# Altium PCB PCB1.PcbDoc
Units mil, origin at the board's own origin, x right, y up, seen from the top; angles counter-clockwise.
Board outline 4435 x 3180 mil, 2 copper layers (Top Layer, Bottom Layer); 13 components, 10 nets, 34 pads, 0 vias.
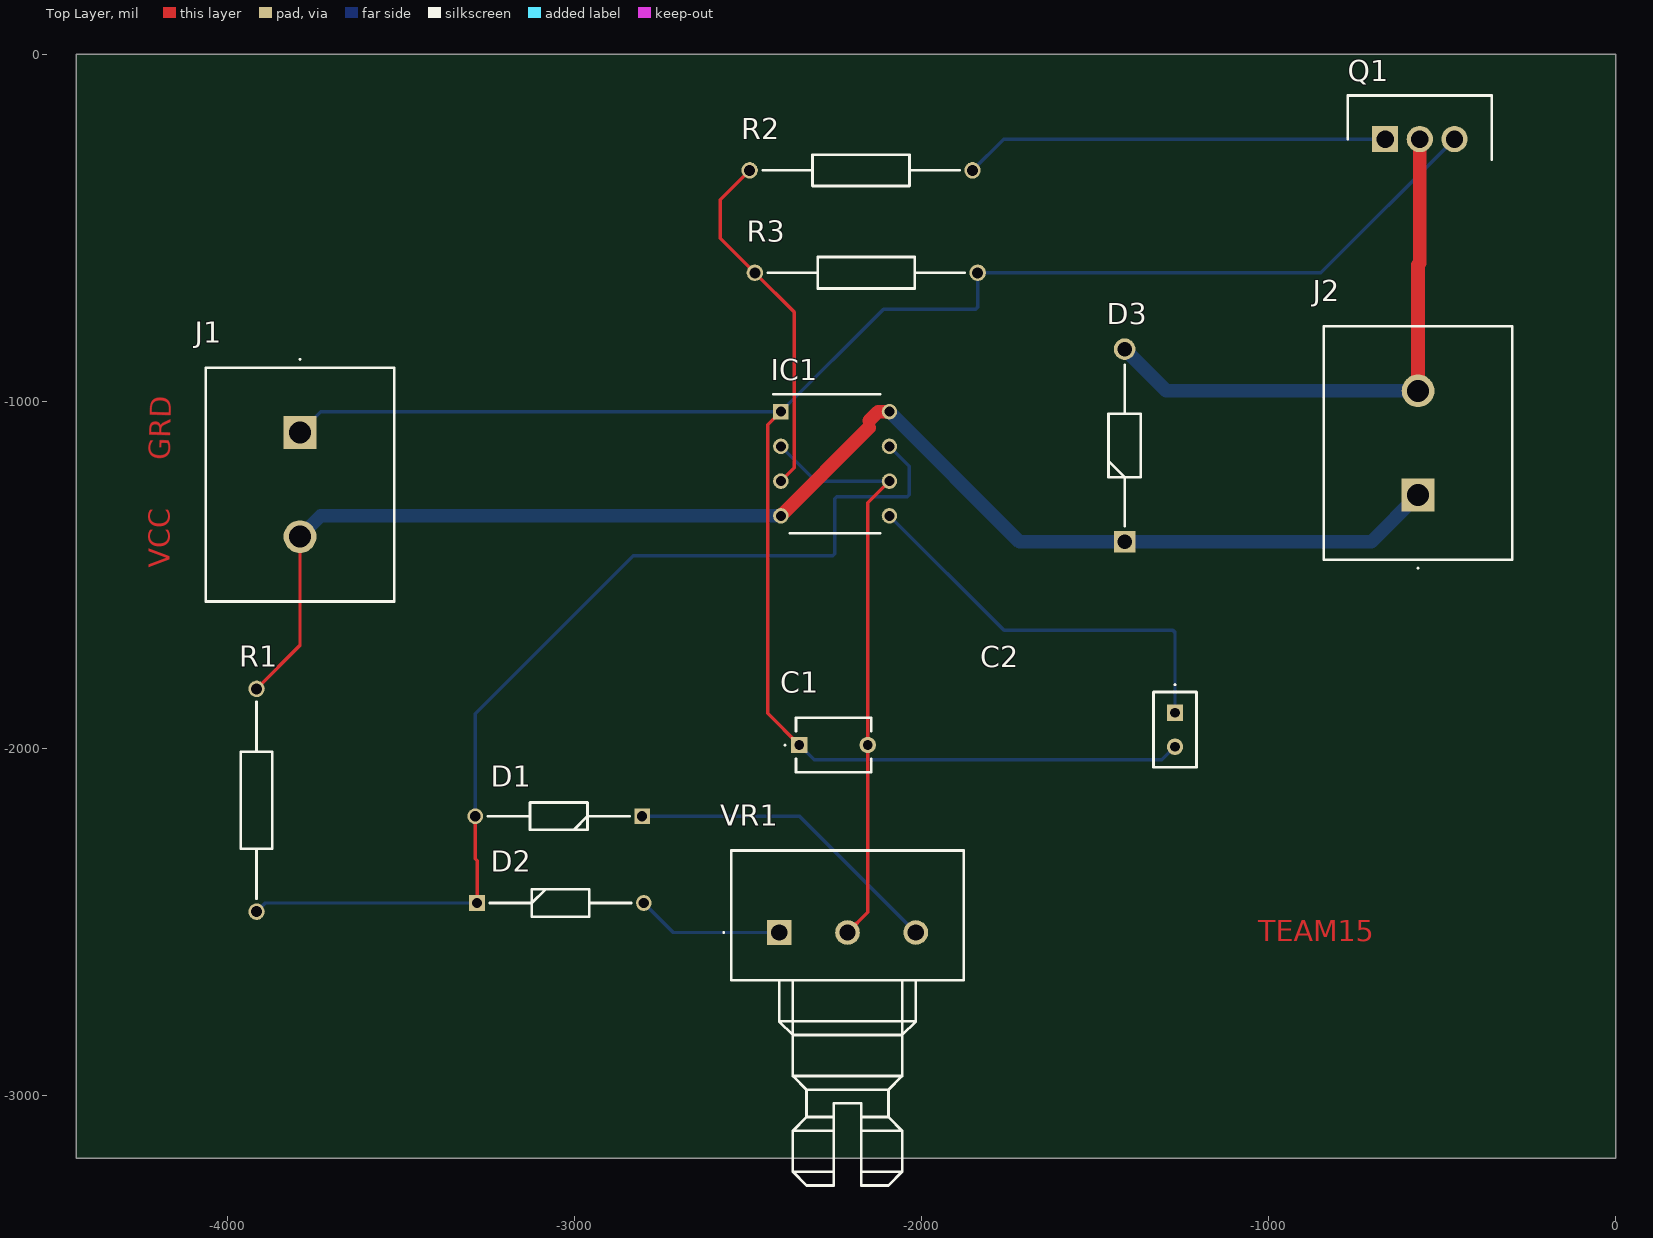
[diagram p0: Top Layer view]
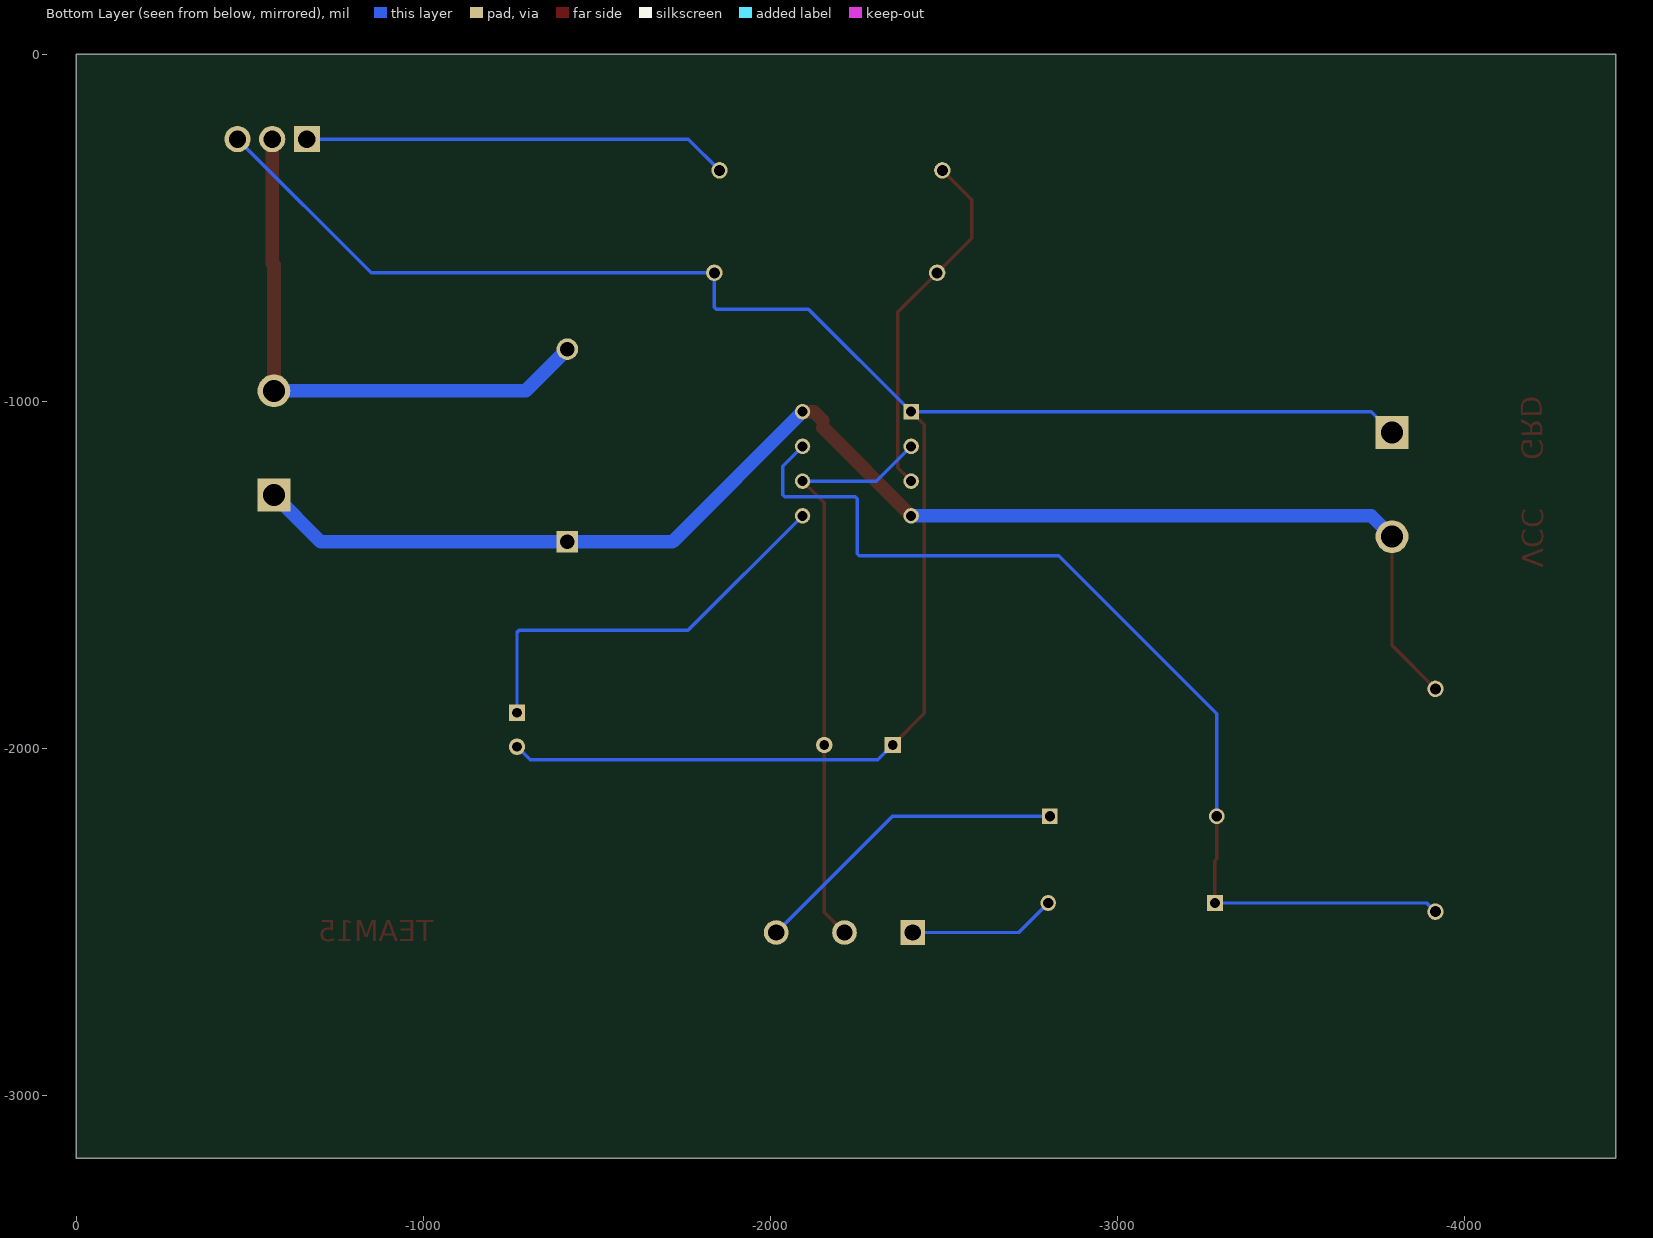
[diagram p1: Bottom Layer view, seen from below]
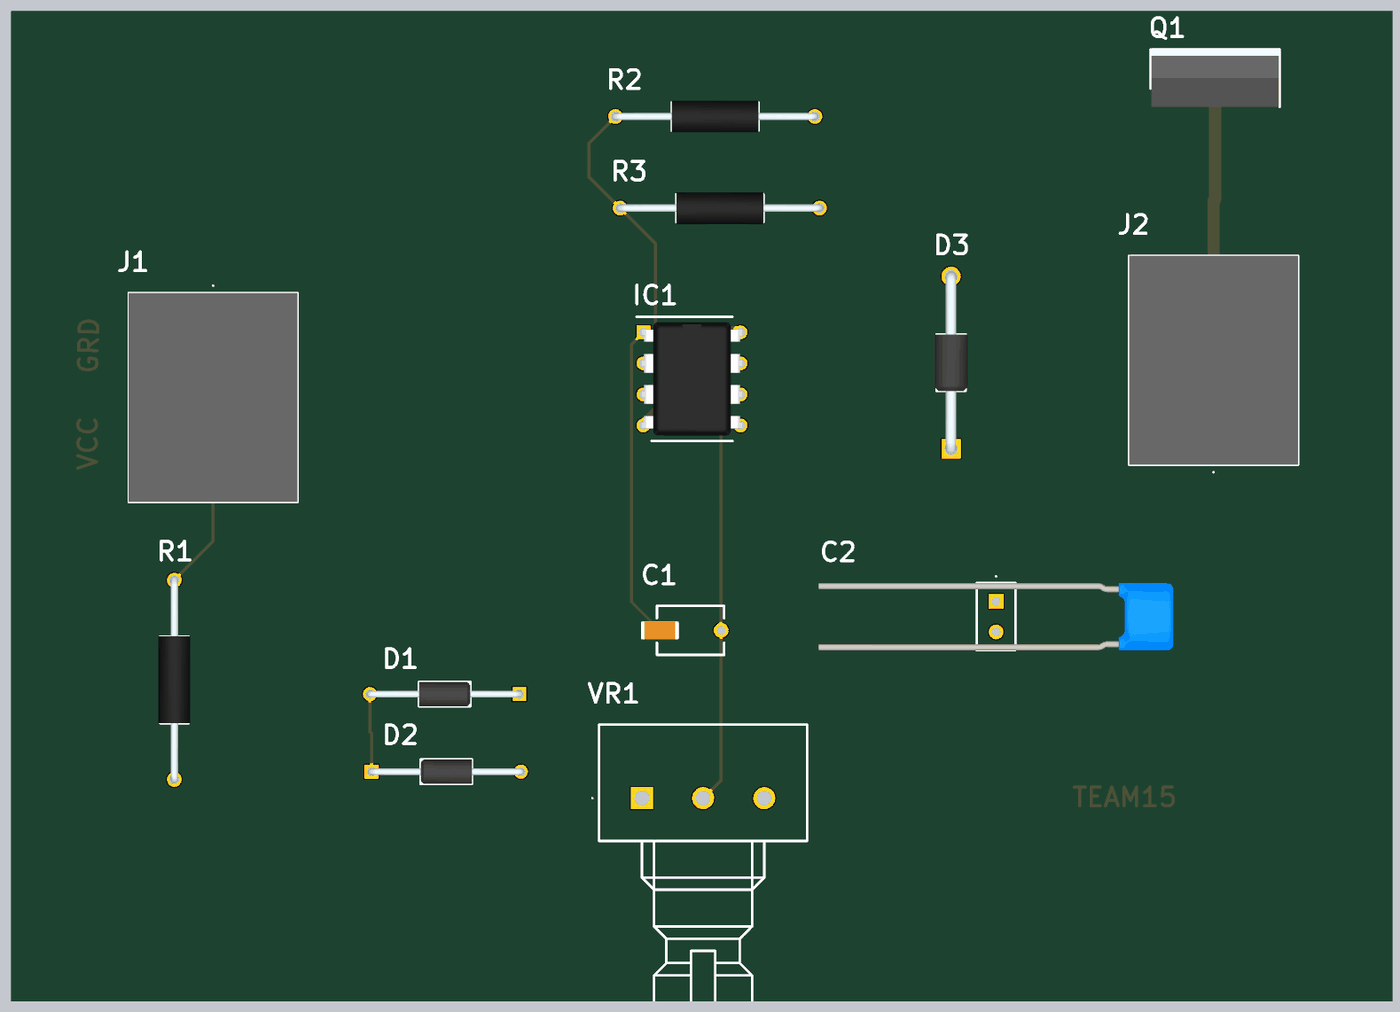
[diagram p2: 3D render of the assembled board from above, using the file's embedded part models]

## Layer stack, top to bottom
Top Solder: solder mask 0.4, Solder Resist, Dk 3.5
Top Layer: signal copper 1.4
Dielectric 1: dielectric 12.6, FR-4, Dk 4.8
Bottom Layer: signal copper 1.4
Bottom Solder: solder mask 0.4, Solder Resist, Dk 3.5

## Board outline
-4435,-3180 0,-3180 0,0 -4435,0

## Design rules (kind name [scope] priority, off if disabled: settings)
Clearance [All] p1: gap=10 ignorepadtopadclearanceinfootprint=FALSE except(0: Arc-Hole Track-Hole SMDPad-Hole THPad-Hole Via-Hole Fill-Hole Poly-Hole Region-Hole Text-Hole)
PolygonConnect [All] p1: connectstyle=Relief reliefconductorwidth=10 reliefentries=4 polygonreliefangle="90 Angle" airgapwidth=10
RoutingVias [All] p1: holewidth=28 width=50 viastyle="Through Hole" minholewidth=28 minwidth=50 maxholewidth=28 maxwidth=50
SilkToSolderMaskClearance [IsPad] p1: minsilkscreentomaskgap=5 clearancetoexposedcopper=TRUE
SolderMaskExpansion [All] p1: expansion=4 istentingtop=FALSE
Width [All] p1: maxlimit=39.37 minlimit=10 preferedwidth=10 minimp=50.000000 maximp=50.000000 favimp=50.000000
29 further rules are at their usual default settings.

## Components (designator, comment, footprint, x,y, rotation, side; value= is the part's Value field where it differs from the comment)
C1 "RDEC71H106K3K1H03B" RDEC71H106K3K1H03B -2351.85,-1990 r0 top
C2 "RCE5C1H104J2A2H03B" RCE5C1H104J2A2H03B -1270,-1896.57 r270 top
D1 "1N4148-B" DIOAD1220W56L420D200 -2804.68,-2195 r180 top
D2 "1N4148-B" DIOAD1220W56L420D200 -3280,-2445 r0 top
D3 "1N4007-T" DIOAD1408W86L464D236 -1415,-1405 r90 top
IC1 "LM555CN_NOPB" DIP794W53P254L959H508Q8N -2248.7,-1180 r0 top
J1 "KF25C-7.62-2P" KF25C7622P -3790,-1090 r270 top
J2 "KF25C-7.62-2P" KF25C7622P -570,-1270 r90 top
Q1 "IRFZ24NPBF" TO254P469X1042X1967-3P -665,-245 r0 top
R1 "MF1_4DCT52A1001F" RESAD1630W60L710D230 -3915,-1828.27 r270 top
R2 "MF1_4DCT52A1001F" RESAD1630W60L710D230 -2495,-335 r0 top
R3 "MF1_4DCT52A1001F" RESAD1630W60L710D230 -2480,-630 r0 top
VR1 "P160KN2-0EC15B100K" P160KN20EC15B100K -2410,-2530 r0 top

## Footprints (in the part's own frame and the unit in brackets; to place one, negate y for a bottom-side part, rotate by r counter-clockwise, add the part's x,y. Pads: shape width x height; smd on the part's side, far side on the other; paste and mask are expansions set on the pad)
DIOAD1220W56L420D200 [mm]
  rect 1.15x1.15 hole 0.75: 1(0,0)
  round 1.15 hole 0.75: 2(12.2,0)
  silkscreen extent 0.92,-1 11.27,1, body extent -0.28,-0.99 12.48,0.99, height 2
DIOAD1408W86L464D236 [mm]
  rect 1.575x1.575 hole 1.05: 1(0,0)
  round 1.575 hole 1.05: 2(14.1,0)
  silkscreen extent 1.14,-1.18 12.96,1.18, body extent -0.43,-1.35 14.51,1.35, height 2.72
DIP794W53P254L959H508Q8N [mm]
  rect 1.13x1.13 hole 0.73: 1(-3.97,3.81)
  round 1.13 hole 0.73: 2(-3.97,1.27) 3(-3.97,-1.27) 4(-3.97,-3.81) 5(3.97,-3.81) 6(3.97,-1.27) 7(3.97,1.27) 8(3.97,3.81)
  silkscreen extent -4.54,-5.08 3.3,5.08, body extent -4.1,-4.64 4.1,4.64, height 4.21
KF25C7622P [mm]
  rect 2.4x2.4 hole 1.6: 1(0,0)
  round 2.4 hole 1.6: 2(7.62,0)
  silkscreen extent -5.4,-6.9 12.36,6.9, body extent -4.73,-6.9 12.35,6.9, height 15
P160KN20EC15B100K [mm]
  rect 1.8x1.8 hole 1.2: 1(0,0)
  round 1.8 hole 1.2: 2(5,0) 3(10,0)
  silkscreen extent -4.1,-18.5 13.5,6
RCE5C1H104J2A2H03B [mm]
  rect 1.2x1.2 hole 0.7: 1(0,0)
  round 1.2 hole 0.7: 2(2.5,0)
  silkscreen extent -2.1,-1.58 4,1.58, body extent -1.5,-14.5 4,14.5, height 3.16
RDEC71H106K3K1H03B [mm]
  rect 1.2x1.2 hole 0.7: 1(0,0)
  round 1.2 hole 0.7: 2(5,0)
  silkscreen extent -1.1,-2 5.25,2, body extent -1.55,-0.75 1.55,0.75, height 2
RESAD1630W60L710D230 [mm]
  round 1.2 hole 0.8: 1(0,0) 2(16.3,0)
  silkscreen extent 0.95,-1.15 15.35,1.15, body extent -0.3,-1.29 16.6,1.29, height 2.6
TO254P469X1042X1967-3P [mm]
  rect 1.92x1.92 hole 1.28: 1(0,0)
  round 1.92 hole 1.28: 2(2.54,0) 3(5.08,0)
  silkscreen extent -2.73,-1.49 7.81,3.2, body extent -2.67,-1.5 7.75,3.19, height 18.84

## Part data
C1: "Capacitor", Manufacturer_Name="Murata Electronics", Mouser Part Number=81-RDEC71H106K3K1H3B, Arrow Part Number=RDEC71H106K3K1H03B, Arrow Price/Stock=https://www.arrow.com/en/products/rdec71h106k3k1h03b/murata-manufacturing?region=nac, Datasheet Link=https://psearch.en.murata.com/capacitor/product/RDEC71H106K3K1H03B.html, Height=7.5mm, Manufacturer_Part_Number=RDEC71H106K3K1H03B, Mouser Price/Stock=https://www.mouser.co.uk/ProductDetail/Murata-Electronics/RDEC71H106K3K1H03B?qs=hNud%2FORuBR3znCHotF4tAw%3D%3D
C2: "Capacitor", Manufacturer_Name="Murata Electronics", Mouser Part Number=81-RCE5C1H104J2A2H3B, Datasheet Link=https://psearch.en.murata.com/capacitor/product/RCE5C1H104J2A2H03B.html, Height=5.5mm, Manufacturer_Part_Number=RCE5C1H104J2A2H03B, Mouser Price/Stock=https://www.mouser.co.uk/ProductDetail/Murata-Electronics/RCE5C1H104J2A2H03B?qs=qSfuJ%252Bfl%2Fd7lCZVqlAdNaA%3D%3D
D1 D2: "Diode", Manufacturer_Name=Rectron, Mouser Part Number=583-1N4148-B, Datasheet Link=https://www.mouser.com/datasheet/2/345/1n4148-32420.pdf, Manufacturer_Part_Number=1N4148-B, Mouser Price/Stock=https://www.mouser.co.uk/ProductDetail/Rectron/1N4148-B?qs=sWbhZyXmMVdOMNi48au4Gw%3D%3D
D3: "Diode", Manufacturer_Name="Diodes Incorporated", Mouser Part Number=621-1N4007, Arrow Part Number=1N4007-T, Arrow Price/Stock=https://www.arrow.com/en/products/1n4007-t/diodes-incorporated?region=europe, Datasheet Link=https://www.diodes.com/assets/Datasheets/ds28002.pdf, Manufacturer_Part_Number=1N4007-T, Mouser Price/Stock=https://www.mouser.co.uk/ProductDetail/Diodes-Incorporated/1N4007-T?qs=e%2FRqmsgwm9iVtgJYUW23AA%3D%3D
IC1: "Integrated Circuit", Arrow Part Number=LM555CN/NOPB, Manufacturer_Name="Texas Instruments", Mouser Part Number=926-LM555CN/NOPB, Arrow Price/Stock=https://www.arrow.com/en/products/lm555cnnopb/texas-instruments?region=nac, Datasheet Link=https://datasheet.datasheetarchive.com/originals/distributors/Datasheets-SFU2/DSASFU100035550.pdf, Height=5.08mm, Manufacturer_Part_Number=LM555CN/NOPB, Mouser Price/Stock=https://www.mouser.co.uk/ProductDetail/Texas-Instruments/LM555CN-NOPB?qs=QbsRYf82W3GjZpQL%2FakZOg%3D%3D
J1 J2: "Connector", Manufacturer_Name=KEFA, Datasheet Link=https://datasheet.lcsc.com/lcsc/2007211836_Cixi-Kefa-Elec-KF25C-7-62-2P_C707361.pdf, Height=14.9mm, Manufacturer_Part_Number=KF25C-7.62-2P
Q1: "MOSFET (N-Channel)", Manufacturer_Name=Infineon, Mouser Part Number=942-IRFZ24NPBF, Arrow Part Number=IRFZ24NPBF, Arrow Price/Stock=https://www.arrow.com/en/products/irfz24npbf/infineon-technologies-ag?region=europe, Datasheet Link=https://www.mouser.com/datasheet/2/196/irfz24npbf-1227512.pdf, Height=4.69mm, Manufacturer_Part_Number=IRFZ24NPBF, Mouser Price/Stock=https://www.mouser.co.uk/ProductDetail/Infineon-Technologies/IRFZ24NPBF?qs=9%252BKlkBgLFf0TQgSTtY4J0g%3D%3D
R1 R2 R3: "Resistor", Arrow Part Number=MF1/4DCT52A1001F, Manufacturer_Name="KOA Speer", Mouser Part Number=660-MF1/4DCT52A1001F, Arrow Price/Stock=https://www.arrow.com/en/products/mf14dct52a1001f/koa-speer-electronics, Datasheet Link=http://www.koaspeer.com/catimages/Products/MF-MFS-RK/MF-MFS-RK.pdf, Manufacturer_Part_Number=MF1/4DCT52A1001F, Mouser Price/Stock=https://www.mouser.co.uk/ProductDetail/KOA-Speer/MF1-4DCT52A1001F?qs=GXuM9q1TrDlY%2FqXVQL%252Bxmw%3D%3D
VR1: "Variable Resistor", Manufacturer_Name="TT Electronics", Mouser Part Number=858-P160KN20C15B100K, Datasheet Link=https://www.ttelectronics.com/TTElectronics/media/ProductFiles/Datasheet/P160.pdf, Height=26.5mm, Manufacturer_Part_Number=P160KN2-0EC15B100K, Mouser Price/Stock=https://www.mouser.co.uk/ProductDetail/BI-Technologies-TT-Electronics/P160KN2-0EC15B100K?qs=%252BUYXD5bnyXqjlf76hl%2F8FQ%3D%3D

## Nets (pads, with @x,y where several pads share a name; then routed paths per layer and width w, separated by ;. In a path a pad name is that pad's centre, name@x,y a point inside that pad or via, vN(x,y) a via of type N, cw(c..) or ccw(c..) an arc to the next point about the centre after c; other vN are vias at no path point)
GND: C1.1 C2.2 IC1.1 J1.1 Q1.3 R3.2 | length 5861.7
  Top Layer w10: IC1.1 -2443,-1068 -2443,-1898.85 C1.1
  Bottom Layer w10: J1.1 -3730,-1030 IC1.1 -2109.47,-734.47 -1844.13,-734.47 -1838.27,-728.62 R3.2 -850,-630 Q1.3 ; C1.1 -2308.85,-2033 -1308,-2033 C2.2
NetC1_2: C1.2 IC1.2 IC1.6 VR1.2 | length 1704
  Top Layer w10: VR1.2 -2155,-2471.85 C1.2 -2155,-1292.6 IC1.6
  Bottom Layer w10: IC1.2 -2305,-1230 IC1.6
NetC2_1: C2.1 IC1.5 | length 1192.2
  Bottom Layer w10: IC1.5 -1762.4,-1660 -1275.86,-1660 -1270,-1665.86 C2.1
NetD1_1: D1.1 VR1.3 | length 927.1
  Bottom Layer w10: D1.1 -2351.3,-2195 VR1.3
NetD1_2: D1.2 D2.1 IC1.7 R1.2 | length 2959.4
  Top Layer w10: D1.2 -3285,-2318 -3280,-2323 D2.1
  Bottom Layer w10: R1.2 -3890,-2445 D2.1 ; D1.2 -3285,-1900 -2830,-1445 -2255.86,-1445 -2250,-1439.14 -2250,-1280.86 -2244.14,-1275 -2040.86,-1275 -2035,-1269.14 -2035,-1187.4 IC1.7
NetD2_2: D2.2 VR1.1 | length 424.9
  Bottom Layer w10: D2.2 -2714.68,-2530 VR1.1
NetD3_1: D3.1 IC1.4 IC1.8 J1.2 J2.1 R1.1 | length 4082.1
  Top Layer w10: R1.1 -3790,-1703.27 J1.2 ; -2151,-1076 -2151,-1056
  Top Layer w39.37: IC1.4 -2151,-1076 ; -2151,-1056 -2125,-1030 IC1.8
  Bottom Layer w39.37: J1.2 -3730,-1330 IC1.4 ; IC1.8 -1717.4,-1405 D3.1 -705,-1405 J2.1
NetD3_2: D3.2 J2.2 Q1.2 | length 1621.8
  Top Layer w10: -570,-607 -565,-602
  Top Layer w39.37: J2.2 -570,-607 ; -565,-602 Q1.2
  Bottom Layer w39.37: D3.2 -1294.88,-970 J2.2
NetIC1_3: IC1.3 R2.1 R3.1 | length 1034.2
  Top Layer w10: R2.1 -2580,-420 -2580,-530 R3.1 -2367,-743 -2367,-1192 IC1.3
NetQ1_1: Q1.1 R2.2 | length 1225.5
  Bottom Layer w10: R2.2 -1763.27,-245 Q1.1

## Other copper
Top Layer:
  text "GRD" at -4164.74,-1169.75 h60 r88.53
  text "VCC" at -4165,-1480 h60 r90
  text "TEAM15" at -1030,-2555 h60

## Silkscreen, mask and mechanical layers (free items; w line width, h text height)
CUTOUT:
  the board outline again, w10